# Altium PCB DE-220124.PcbDoc
Units mil, origin at the board's own origin, x right, y up, seen from the top; angles counter-clockwise.
Board outline 4095 x 2385 mil, 2 copper layers (Top Layer, Bottom Layer), stack 12.8 mil thick; 195 components, 109 nets, 551 pads, 65 vias.
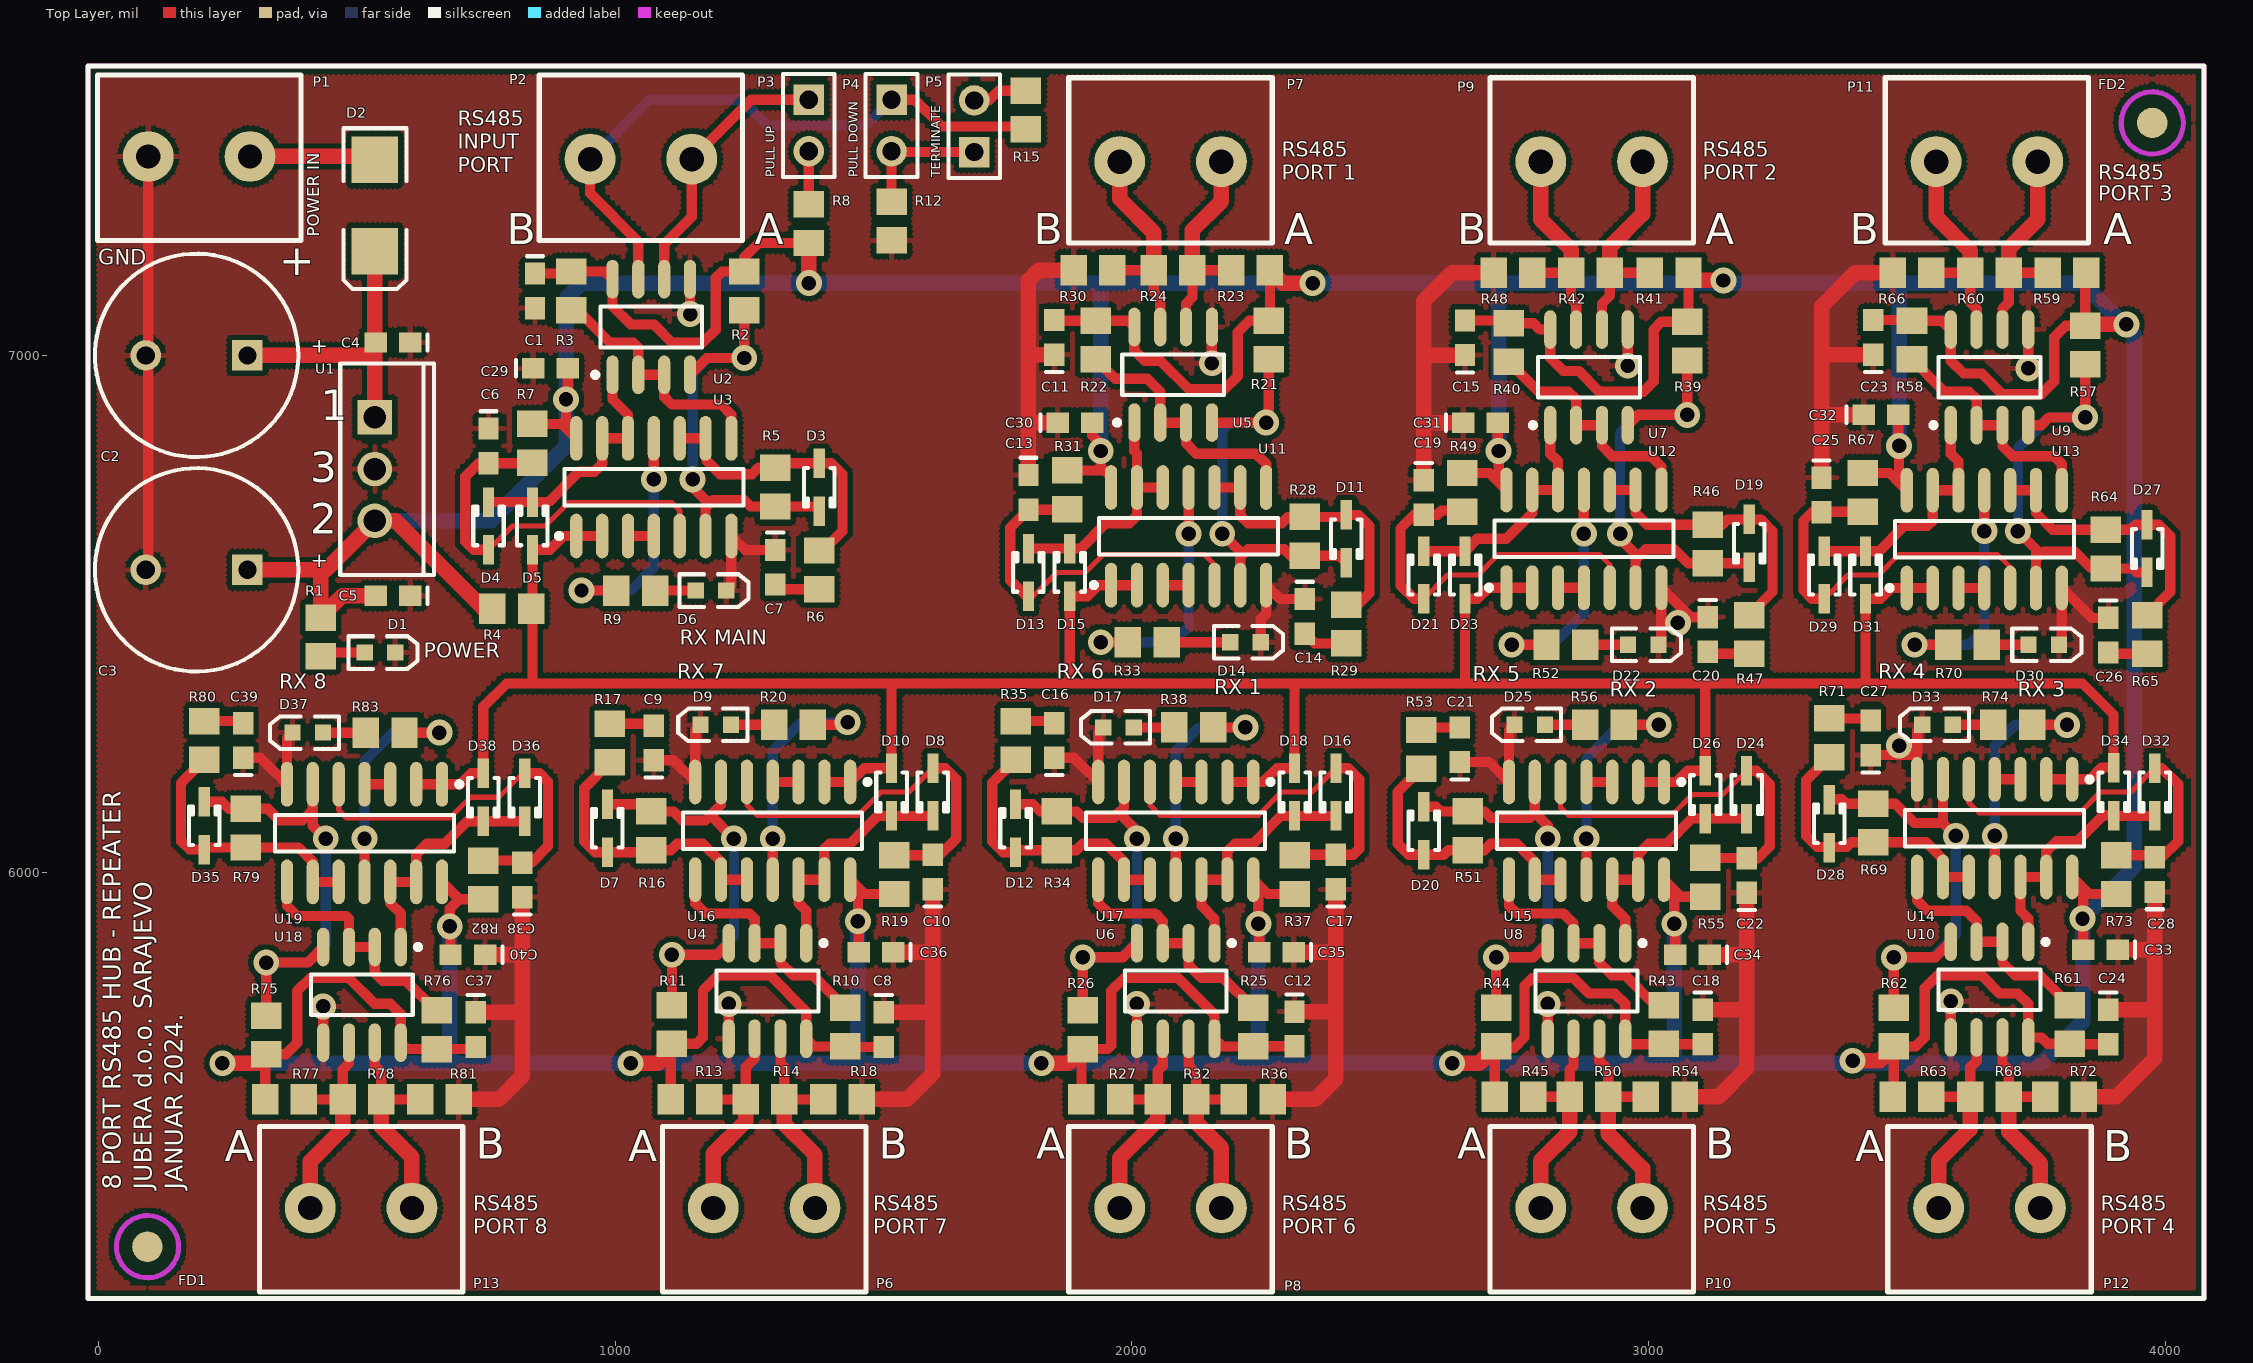
[diagram p0: Top Layer view]
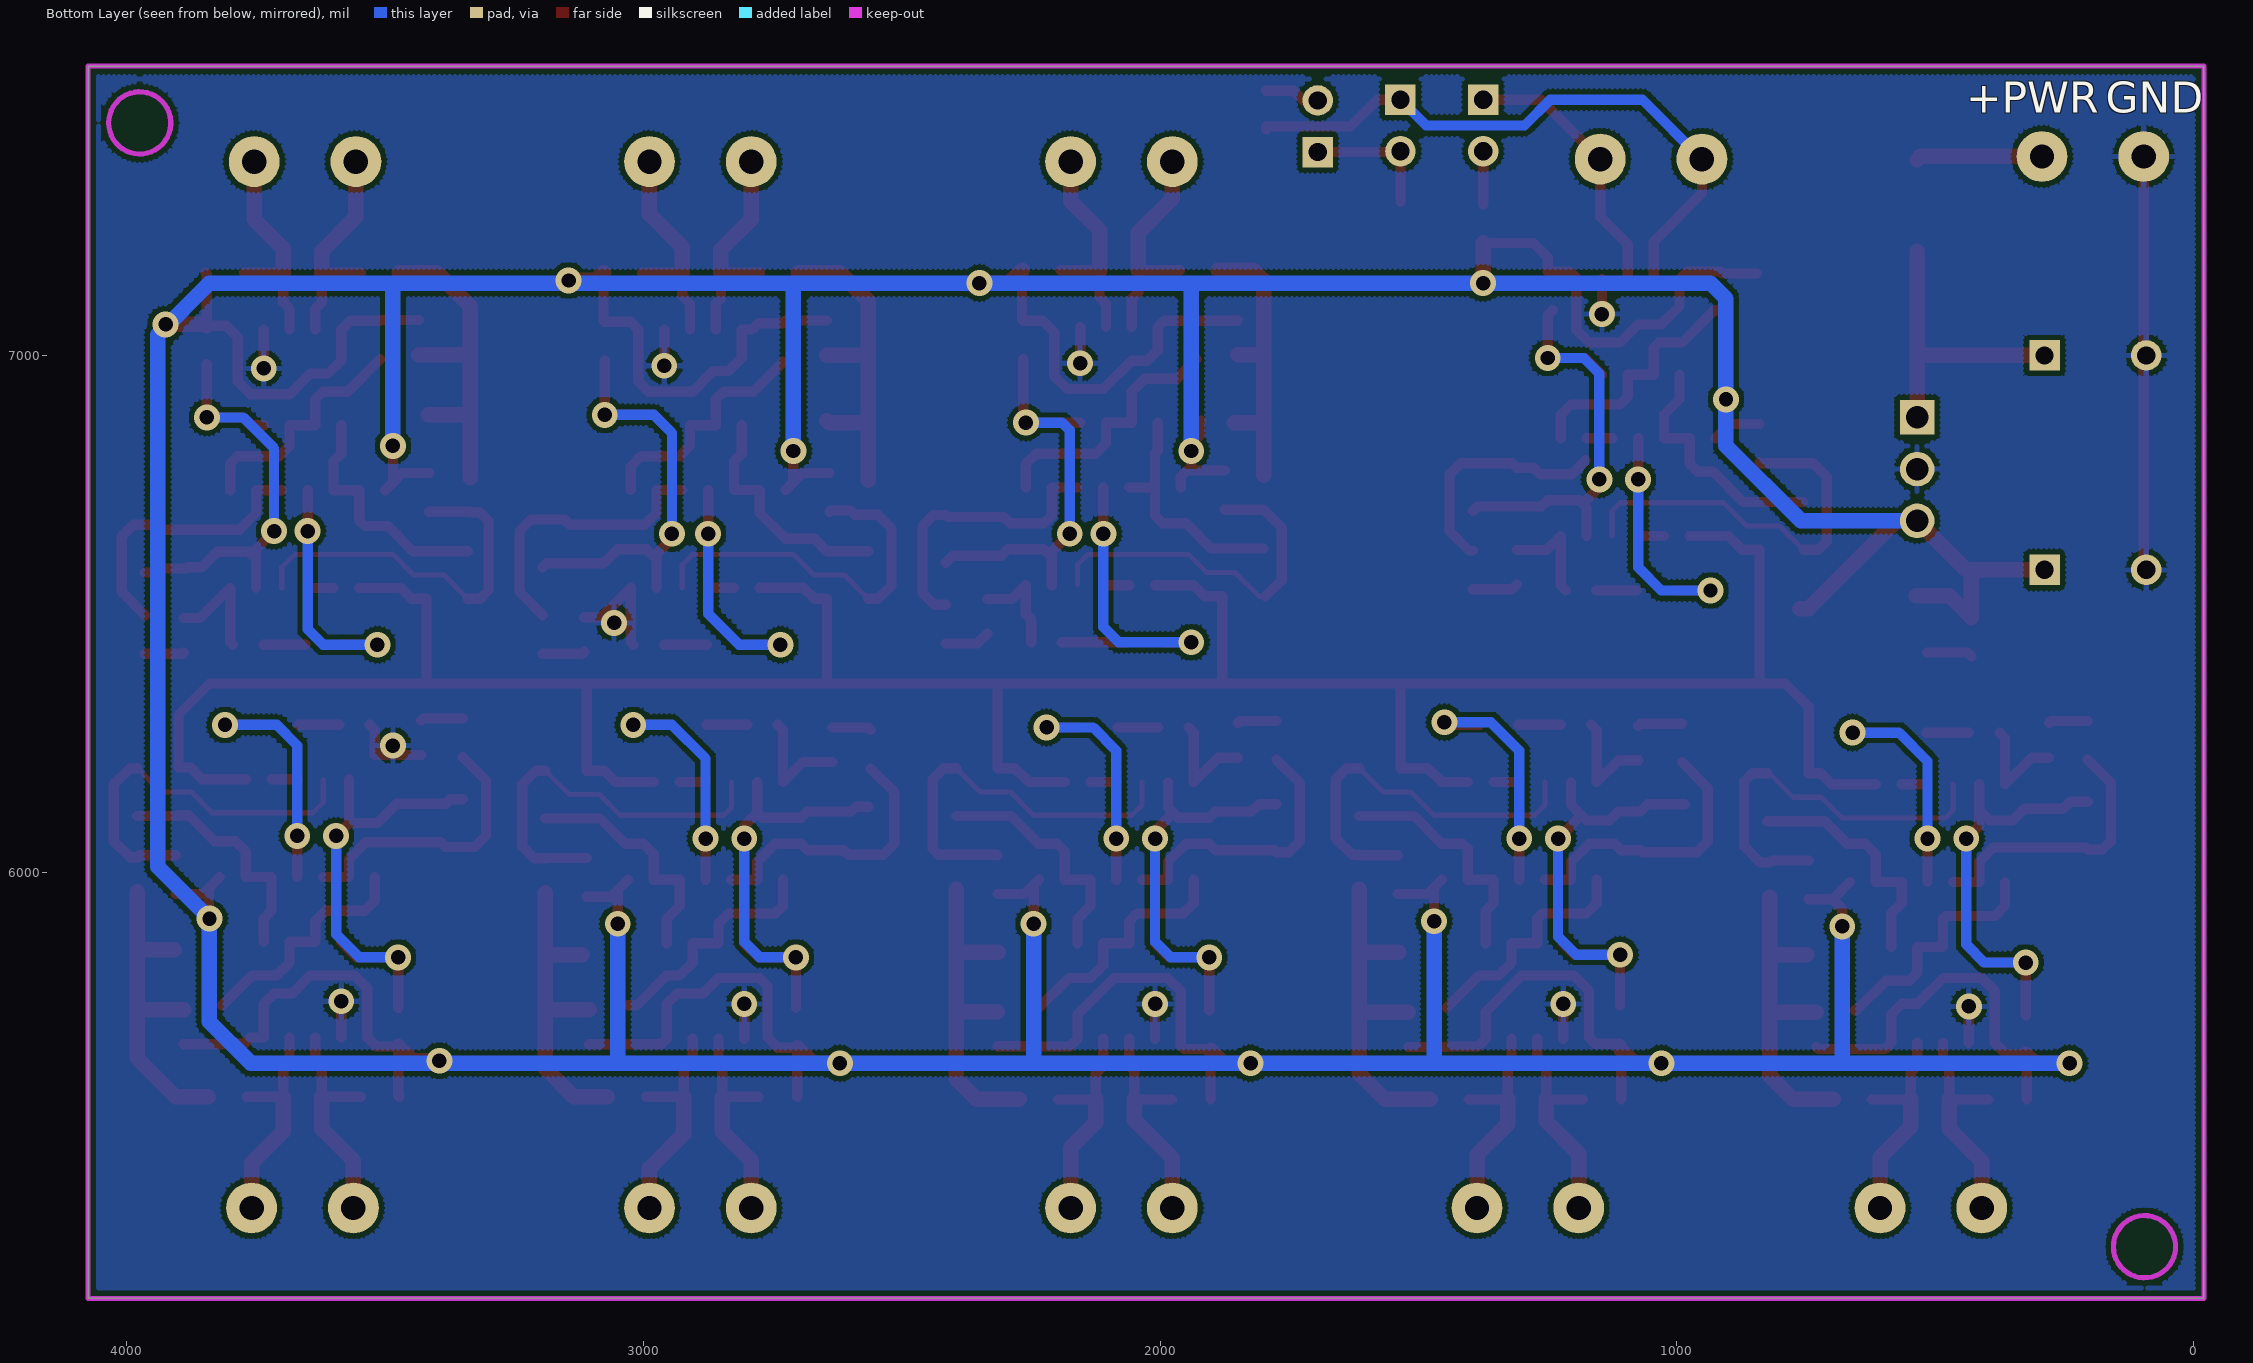
[diagram p1: Bottom Layer view, seen from below]

## Layer stack, top to bottom
Top Solder: solder mask 0.4, Solder Resist, Dk 3.5
Top Layer: signal copper 1.4
Dielectric 1: core 10, FR-4, Dk 4.2
Bottom Layer: signal copper 1.4
Bottom Solder: solder mask 0.4, Solder Resist, Dk 3.5

## Board outline
-20,5175 -20,7560 4075,7560 4075,5175

## Design rules (kind name [scope] priority, off if disabled: settings)
Clearance Clearance_1 [All] p1: gap=10 ignorepadtopadclearanceinfootprint=FALSE except(0: Arc-Hole Track-Hole SMDPad-Hole THPad-Hole Via-Hole Fill-Hole Poly-Hole Region-Hole Text-Hole)
Clearance [All] p2: gap=10 ignorepadtopadclearanceinfootprint=FALSE
MinimumSolderMaskSliver [All] p1 off: minsoldermaskwidth=10
PolygonConnect [All] p1: connectstyle=Relief reliefconductorwidth=10 reliefentries=4 polygonreliefangle="90 Angle" airgapwidth=10
RoutingVias [All] p1: holewidth=28 width=50 viastyle="Through Hole" minholewidth=28 minwidth=50 maxholewidth=28 maxwidth=50
SilkToSilkClearance [All] p1 off: silktosilkclearance=10
SilkToSolderMaskClearance [IsPad] p1 off: minsilkscreentomaskgap=10 clearancetoexposedcopper=TRUE
SolderMaskExpansion [All] p1: expansion=4
Width [All] p1: maxlimit=200 minlimit=10 preferedwidth=30
27 further rules are at their usual default settings.

## Classes and differential pairs
component class DE-220124_02: C37 C38 C39 C40 D35 D36 D37 D38 P13 R75 R76 R77 R78 R79 R80 R81 R82 R83 U18 U19
component class DE-220124: C1 C2 C3 C4 C5 C6 C7 C8 C9 C10 C11 C12 C13 C14 C15 C16 C17 C18 C19 C20 C21 C22 C23 C24 C25 C26 C27 C28 C29 C30 C31 C32 C33 C34 C35 C36 D1 D2 D3 D4 D5 D6 D7 D8 D9 D10 D11 D12 D13 D14 D15 D16 D17 D18 D19 D20 D21 D22 D23 D24 D25 D26 D27 D28 D29 D30 D31 D32 D33 D34 FD1 FD2 P1 P2 P3 P4 P5 P6 P7 P8 P9 P10 P11 P12 R1 R2 R3 R4 R5 R6 R7 R8 R9 R10 R11 R12 R13 R14 R15 R16 R17 R18 R19 R20 R21 R22 R23 R24 R25 R26 R27 R28 R29 R30 R31 R32 R33 R34 R35 R36 R37 R38 R39 R40 R41 R42 R43 R44 R45 R46 R47 R48 R49 R50 R51 R52 R53 R54 R55 R56 R57 R58 R59 R60 R61 R62 R63 R64 R65 R66 R67 R68 R69 R70 R71 R72 R73 R74 U1 U2 U3 U4 U5 U6 U7 U8 U9 U10 U11 U12 U13 U14 U15 U16 U17

## Components (designator, comment, footprint, x,y, rotation, side; value= is the part's Value field where it differs from the comment)
C1 "100nF" 0603 845,7125 r270 top
C2 "470uF" CAPPR5-10X12.5 190,7000 r180 top
C3 "470uF" CAPPR5-10X12.5 190,6585 r180 top
C4 "100nF" 0603 570,7025 r180 top
C5 "100nF" 0603 570,6535 r180 top
C6 "68pF" 0603 755,6825 r270 top
C7 "1nF" 0603 1310,6590 r270 top
C8 "100nF" 0603 1520,5695 r270 top
C9 "1nF" 0603 1075,6250 r90 top
C10 "68pF" 0603 1615,6000 r90 top
C11 "100nF" 0603 1850,7035 r90 top
C12 "100nF" 0603 2315,5696.54 r270 top
C13 "68pF" 0603 1800,6735 r270 top
C14 "1nF" 0603 2335,6495 r270 top
C15 "100nF" 0603 2645,7034.23 r90 top
C16 "1nF" 0603 1850,6255 r90 top
C17 "68pF" 0603 2395,6000 r90 top
C18 "100nF" 0603 3105,5700 r270 top
C19 "68pF" 0603 2565,6725 r270 top
C20 "1nF" 0603 3115,6460 r270 top
C21 "1nF" 0603 2635,6246.54 r90 top
C22 "68pF" 0603 3190,5993.46 r90 top
C23 "100nF" 0603 3435,7035 r90 top
C24 "100nF" 0603 3890,5700 r270 top
C25 "68pF" 0603 3335,6730 r270 top
C26 "1nF" 0603 3890,6458.46 r270 top
C27 "1nF" 0603 3430,6260 r90 top
C28 "68pF" 0603 3980,5995 r90 top
C29 "100nF" 0603 875,6975 r0 top
C30 "100nF" 0603 1890,6870 r0 top
C31 "100nF" 0603 2675,6870 r0 top
C32 "100nF" 0603 3450,6885 r0 top
C33 "100nF" 0603 3875,5850 r180 top
C34 "100nF" 0603 3085,5840 r180 top
C35 "100nF" 0603 2280,5845 r180 top
C36 "100nF" 0603 1505,5845 r180 top
C37 "100nF" 0603 730,5695 r270 top
C38 "1nF" 0603 820,5985 r90 top
C39 "1nF" 0603 280,6255 r90 top
C40 "100nF" 0603 715,5840 r180 top
D1 "HSMZ-C190" 1.6X0.8X0.8 545,6425 r0 top
D2 "D Schottky" SMB 535,7290 r270 top
D3 "1N4148" SOD323 1395,6745 r270 top
D4 "1N4148" SOD323 755,6670 r90 top
D5 "1N5819" SOD323 840,6670 r90 top
D6 "HSMZ-C190" 1.6X0.8X0.8 1185.47,6545 r0 top
D7 "1N4148" SOD323 985,6085 r90 top
D8 "1N4148" SOD323 1615,6155 r270 top
D9 "HSMZ-C190" 1.6X0.8X0.8 1195,6285 r180 top
D10 "1N5819" SOD323 1535,6155 r270 top
D11 "1N4148" SOD323 2415,6645 r270 top
D12 "1N4148" SOD323 1775,6085 r90 top
D13 "1N4148" SOD323 1800,6580 r90 top
D14 "HSMZ-C190" 1.6X0.8X0.8 2220,6445 r0 top
D15 "1N5819" SOD323 1880,6580 r90 top
D16 "1N4148" SOD323 2395,6155 r270 top
D17 "HSMZ-C190" 1.6X0.8X0.8 1974.53,6280 r180 top
D18 "1N5819" SOD323 2315,6155 r270 top
D19 "1N4148" SOD323 3195,6636.26 r270 top
D20 "1N4148" SOD323 2565,6080 r90 top
D21 "1N4148" SOD323 2565,6575 r90 top
D22 "HSMZ-C190" 1.6X0.8X0.8 2990,6440 r0 top
D23 "1N5819" SOD323 2645,6575 r90 top
D24 "1N4148" SOD323 3190,6150 r270 top
D25 "HSMZ-C190" 1.6X0.8X0.8 2770,6285 r180 top
D26 "1N5819" SOD323 3110,6150 r270 top
D27 "1N4148" SOD323 3965,6626.26 r270 top
D28 "1N4148" SOD323 3350,6093.74 r90 top
D29 "1N4148" SOD323 3340,6575 r90 top
D30 "HSMZ-C190" 1.6X0.8X0.8 3765,6440 r0 top
D31 "1N5819" SOD323 3420,6575 r90 top
D32 "1N4148" SOD323 3980,6155 r270 top
D33 "HSMZ-C190" 1.6X0.8X0.8 3559.53,6285 r180 top
D34 "1N5819" SOD323 3900.63,6155.63 r270 top
D35 "1N4148" SOD323 205,6090 r90 top
D36 "1N4148" SOD323 825,6145 r270 top
D37 "HSMZ-C190" 1.6X0.8X0.8 405,6270 r180 top
D38 "1N5819" SOD323 745,6145 r270 top
FD1 "Fiducial" Fiducial 95,5275 r0 top
FD2 "Fiducial" Fiducial 3975,7450 r0 top
P1 "TERMINAL BLOK 2" "TERMINAL BLOK 2" 195,7385 r270 top
P2 "TERMINAL BLOK 2" "TERMINAL BLOK 2" 1050,7380 r90 top
P3 "PULL UP" HDR1X2 1375,7495 r270 top
P4 "PULL DOWN" HDR1X2 1535,7495 r270 top
P5 "TERMINATE" HDR1X2 1695,7393.54 r90 top
P6 "TERMINAL BLOK 2" "TERMINAL BLOK 2" 1288.43,5350 r270 top
P7 "TERMINAL BLOK 2" "TERMINAL BLOK 2" 2075,7375 r90 top
P8 "TERMINAL BLOK 2" "TERMINAL BLOK 2" 2075,5350 r270 top
P9 "TERMINAL BLOK 2" "TERMINAL BLOK 2" 2890,7375 r90 top
P10 "TERMINAL BLOK 2" "TERMINAL BLOK 2" 2890,5350 r270 top
P11 "TERMINAL BLOK 2" "TERMINAL BLOK 2" 3655,7375 r90 top
P12 "TERMINAL BLOK 2" "TERMINAL BLOK 2" 3660,5350 r270 top
P13 "RS485" "TERMINAL BLOK 2" 508.43,5350 r270 top
R1 "1K" ERA-0805 430,6455 r90 top
R2 "1K" ERA-0805 1250,7125 r90 top
R3 "4K7" ERA-0805 915,7125 r90 top
R4 "3K9" ERA-0805 800,6510 r180 top
R5 "27K" ERA-0805 1310,6745 r270 top
R6 "120R" ERA-0805 1395,6585 r90 top
R7 "10K" ERA-0805 840,6830 r270 top
R8 "680R" ERA-0805 1375,7255 r270 top
R9 "1K" ERA-0805 1040,6545 r0 top
R10 "4K7" ERA-0805 1445,5700 r270 top
R11 "1K" ERA-0805 1110,5705 r270 top
R12 "680R" ERA-0805 1535,7260 r270 top
R13 "680R" ERA-0805 1145,5560 r0 top
R14 "120R" ERA-0805 1290,5560 r0 top
R15 "120R" ERA-0805 1795,7475 r270 top
R16 "27K" ERA-0805 1070,6080 r90 top
R17 "120R" ERA-0805 990,6250 r270 top
R18 "680R" ERA-0805 1440,5560 r0 top
R19 "10K" ERA-0805 1540,5995 r90 top
R20 "1K" ERA-0805 1345,6285 r0 top
R21 "1K" ERA-0805 2265,7030 r90 top
R22 "4K7" ERA-0805 1930,7030 r90 top
R23 "680R" ERA-0805 2230,7165 r180 top
R24 "120R" ERA-0805 2080,7165 r180 top
R25 "4K7" ERA-0805 2235,5700 r270 top
R26 "1K" ERA-0805 1905,5695 r270 top
R27 "680R" ERA-0805 1940,5560 r0 top
R28 "27K" ERA-0805 2335,6650 r270 top
R29 "120R" ERA-0805 2415,6480 r90 top
R30 "680R" ERA-0805 1925,7165 r180 top
R31 "10K" ERA-0805 1875,6740 r270 top
R32 "120R" ERA-0805 2087.6,5560 r0 top
R33 "1K" ERA-0805 2030,6445 r0 top
R34 "27K" ERA-0805 1855,6080 r90 top
R35 "120R" ERA-0805 1775,6255 r270 top
R36 "680R" ERA-0805 2235,5560 r0 top
R37 "10K" ERA-0805 2315,5995 r90 top
R38 "1K" ERA-0805 2120,6280 r0 top
R39 "1K" ERA-0805 3075,7027.6 r90 top
R40 "4K7" ERA-0805 2730,7025 r90 top
R41 "680R" ERA-0805 3040,7160 r180 top
R42 "120R" ERA-0805 2887.6,7160 r180 top
R43 "4K7" ERA-0805 3030,5705 r270 top
R44 "1K" ERA-0805 2705,5700 r270 top
R45 "680R" ERA-0805 2740,5565 r0 top
R46 "27K" ERA-0805 3115,6635 r270 top
R47 "120R" ERA-0805 3195,6460 r90 top
R48 "680R" ERA-0805 2737.6,7160 r180 top
R49 "10K" ERA-0805 2640,6735 r270 top
R50 "120R" ERA-0805 2885,5565 r0 top
R51 "27K" ERA-0805 2650,6080 r90 top
R52 "1K" ERA-0805 2840,6440 r0 top
R53 "120R" ERA-0805 2560,6237.6 r270 top
R54 "680R" ERA-0805 3032.4,5565 r0 top
R55 "10K" ERA-0805 3110,5990 r90 top
R56 "1K" ERA-0805 2915,6285 r0 top
R57 "1K" ERA-0805 3845,7020 r90 top
R58 "4K7" ERA-0805 3510,7030 r90 top
R59 "680R" ERA-0805 3810,7160 r180 top
R60 "120R" ERA-0805 3660,7160 r180 top
R61 "4K7" ERA-0805 3815,5705 r270 top
R62 "1K" ERA-0805 3475,5700 r270 top
R63 "680R" ERA-0805 3510,5565 r0 top
R64 "27K" ERA-0805 3885,6625 r270 top
R65 "120R" ERA-0805 3965,6460 r90 top
R66 "680R" ERA-0805 3510,7160 r180 top
R67 "10K" ERA-0805 3415,6735 r270 top
R68 "120R" ERA-0805 3660,5565 r0 top
R69 "27K" ERA-0805 3435,6095 r90 top
R70 "1K" ERA-0805 3617.4,6440 r0 top
R71 "120R" ERA-0805 3350,6260 r270 top
R72 "680R" ERA-0805 3805,5565 r0 top
R73 "10K" ERA-0805 3905,5995 r90 top
R74 "1K" ERA-0805 3705,6285 r0 top
R75 "1K" ERA-0805 325,5685 r270 top
R76 "4K7" ERA-0805 655,5695 r270 top
R77 "680R" ERA-0805 360,5560 r180 top
R78 "120R" ERA-0805 510,5560 r180 top
R79 "27K" ERA-0805 285,6085 r90 top
R80 "120R" ERA-0805 205,6255 r90 top
R81 "680R" ERA-0805 660,5560 r180 top
R82 "27K" ERA-0805 745,5985 r270 top
R83 "1K" ERA-0805 555,6270 r0 top
U1 "L78M05CV" TO220V 535,6780 r270 top
U2 "MAX485" D008_L 1070,7055 r90 top
U3 "MC74AC00D" 751A-03_N 1075,6745 r90 top
U4 "MAX485" D008_L 1295,5770 r270 top
U5 "MAX485" D008_L 2080,6962.52 r90 top
U6 "MAX485" D008_L 2085,5770 r270 top
U7 "MAX485" D008_L 2885,6957.52 r90 top
U8 "MAX485" D008_L 2880,5770 r270 top
U9 "MAX485" D008_L 3660,6957.52 r90 top
U10 "MAX485" D008_L 3660,5772.48 r270 top
U11 "MC74AC00D" 751A-03_N 2110,6650 r90 top
U12 "MC74AC00D" 751A-03_N 2875,6645 r90 top
U13 "MC74AC00D" 751A-03_N 3650,6644.49 r90 top
U14 "MC74AC00D" 751A-03_N 3670,6085 r270 top
U15 "MC74AC00D" 751A-03_N 2880,6080 r270 top
U16 "MC74AC00D" 751A-03_N 1305,6080 r270 top
U17 "MC74AC00D" 751A-03_N 2085,6080 r270 top
U18 "MAX485" D008_L 510,5762.48 r270 top
U19 "MC74AC00D" 751A-03_N 515,6075.51 r270 top

## Footprints (in the part's own frame and the unit in brackets; to place one, negate y for a bottom-side part, rotate by r counter-clockwise, add the part's x,y. Pads: shape width x height; smd on the part's side, far side on the other; paste and mask are expansions set on the pad)
1.6X0.8X0.8 [mm] "SM LED; 2 Flat Leads"
  rect 0.8x0.8 smd: 1(-0.75,0) 2(0.75,0)
  silkscreen extent -1.55,-0.8 1.85,0.8
0603 [mm] "Chip Capacitor; Body 1.6 x 0.8 mm (LxW typ)"
  rect 1.1x1 smd: 1(-0.85,0) 2(0.85,0)
  silkscreen extent -1.7,-0.4 -1.7,0.4
751A-03_N [mm] "SOIC, 14-Leads, Body 8.7x3.9mm, Pitch 1.27mm, IPC Medium Density"
  oval 2.2x0.6 smd: 1(-2.4,3.81) 2(-2.4,2.54) 3(-2.4,1.27) 4(-2.4,0) 5(-2.4,-1.27) 6(-2.4,-2.54) 7(-2.4,-3.81) 8(2.4,-3.81) 9(2.4,-2.54) 10(2.4,-1.27) 11(2.4,0) 12(2.4,1.27) 13(2.4,2.54) 14(2.4,3.81)
  silkscreen extent -2.52,-4.4 0.9,4.78, body extent -2,-4.38 2,4.38, height 1.75
CAPPR5-10X12.5 [mm] "Capacitor, Electrolytic, Radial; Body 10 x 12.5 mm (Dia.xH typ); Pin Spacing 5 mm (typ)"
  rect 1.5x1.5 hole 0.9: 1(-2.5,0)
  round 1.5 hole 0.9: 2(2.5,0)
  silkscreen extent -5,-5 5,5, body extent -5,-5 5,5, height 12.5
D008_L [mm] "SOIC, 8-Leads, Body 4.9x3.9mm, Pitch 1.27mm, IPC High Density"
  oval 1.9x0.6 smd: 1(-2.35,1.905) 2(-2.35,0.635) 3(-2.35,-0.635) 4(-2.35,-1.905) 5(2.35,-1.905) 6(2.35,-0.635) 7(2.35,0.635) 8(2.35,1.905)
  silkscreen extent -2.47,-2.5 1,2.88, body extent -2,-2.5 2,2.5, height 1.75
ERA-0805 [mm] "Chip Resistor; Body 2 x 1.3 mm (LxW typ)"
  rect 1.3x1.5 smd: 1(-0.95,0) 2(0.95,0)
Fiducial [mm] "Pick and place machine mark"
  round 1.5 smd paste+0 mask+0.8: 3(0,0)
  Keep-Out Layer circle w0.254: c0,0 r1.529
HDR1X2 [mm] "Connector; Header; 2 Position"
  rect 1.5x1.5 hole 0.9: 1(0,0)
  round 1.5 hole 0.9: 2(2.54,0)
  silkscreen extent -1.27,-1.27 3.81,1.27
SMB [mm] "DO-214-AA/SMB; 2 C-Bend Leads; Body 5.3 x 3.6 mm, inc. leads (LxW)"
  rect 2.3x2.3 smd: 1(-2.25,0) 2(2.25,0)
  silkscreen extent -3.8,-1.55 4.1,1.55
SOD323 [mm] "SOD-323/SC-76; 2 Leads; Body 1.7 x 1.3 mm, (LxW)"
  rect 1.45x0.55 smd: 1(1.175,0) 2(-1.175,0)
  silkscreen extent -0.95,-0.75 0.95,0.75
"TERMINAL BLOK 2" [mm] "2 pinski terminal blok konektor"
  round 2.5 hole 1.2: 1(0,-2.5) 2(0,2.5)
  silkscreen extent -4,-5 4.13,5
TO220V [mm] "TO, Thru-Hole, Vertical, Heatsink Mounted; 3 In-Line Leads; Pitch 2.54 mm; Pin sequence 1, 3, 2"
  rect 1.7x1.7 hole 1.1: 1(-2.54,0)
  round 1.7 hole 1.1: 2(2.54,0) 3(0,0)
  silkscreen extent -5.2,-1.7 5.2,2.9

## Part data
C1 C4 C5 C6 C7 C8 C9 C10 C11 C12 C13 C14 C15 C16 C17 C18 C19 C20 C21 C22 C23 C24 C25 C26 C27 C28 C29 C30 C31 C32 C33 C34 C35 C36 C37 C38 C39 C40: library part C0603, "Ceramic Chip Capacitor - Standard", PackageDocument=Mar-2001, Code_IPC="1608 [0603]", Code_JEITA=0603, ComponentLink1Description="Manufacturer Link", ComponentLink1URL=http://www.kemet.com/, ComponentLink2Description=Datasheet, ComponentLink2URL=http://www.kemet.com/kemet/web/homepage/kechome.nsf/vapubfilesname/F3102TA.pdf/$file/F3102TA.pdf, DatasheetDocument=Mar-2001, LatestRevisionDate=19-Mar-2004, LatestRevisionNote="Silkscreen size reduced.", Note="Footprint corresponds to dimensions for bulk cassette packaging. This case size has tightened tolerances.", PackageReference=0603, Published=17-Jul-2002, Publisher="Altium Limited"
C2 C3: library part EKA00DC347E00, "Aluminum Electrolytic Capacitor, Radial Style with Long Leads: 470uF, 25V", ComponentLink1Description="Manufacturer Link", ComponentLink1URL=http://www.vishay.com/, ComponentLink2Description=Datasheet, ComponentLink2URL=http://www.vishay.com/docs/25014/eka.pdf, DatasheetDocument=20-Feb-2001, DrillSize="Nominal, Rounded To The Nearest 0.1mm", Note="Refer to Manufacturer's Data Sheets for other lead formations", PackageReference=CAPPR5-10X12.5, Published=19-Mar-2004, Publisher="Altium Limited"
D1 D6 D9 D14 D17 D22 D25 D30 D33 D37: "High Performance Chip LED, Red", LED_Colour=Red, ComponentLink1Description="Manufacturer Link", ComponentLink1URL=http://www.avagotech.com/, ComponentLink2Description=Datasheet, ComponentLink2URL=http://cp.literature.agilent.com/litweb/pdf/5988-5891EN.pdf, DatasheetVersion=11-Mar-2002, LuminousIntensity="40mcd (Minimum).", PackageDescription="SM LED; 2 Flat Leads", PackageReference=1.6X0.8X0.8, PackageVersion=Mar-2002, PCB_Layout="Complies with manufacturer's recommendation.", Published=11-Dec-2002, Publisher="Altium Limited"
D2: "Schottky Diode", Code_JEDEC=DO-214-AA, LatestRevisionDate=17-Jul-2002, LatestRevisionNote="Re-released for DXP Platform.", PackageDescription="DO-214-AA/SMB; 2 C-Bend Leads; Body 5.3 x 3.6 mm, inc. leads (LxW)", PackageReference=SMB, Published=8-Jun-2000, Publisher="Altium Limited"
D3 D4 D5 D7 D8 D10 D11 D12 D13 D15 D16 D18 D19 D20 D21 D23 D24 D26 D27 D28 D29 D31 D32 D34 D35 D36 D38: library part BAS321, "General-purpose Diode", ComponentLink1Description="Manufacturer Link", ComponentLink1URL=http://www.semiconductors.philips.com/, ComponentLink2Description=Datasheet, ComponentLink2URL=http://www.semiconductors.philips.com/acrobat/datasheets/BAS321_2.pdf, DatasheetVersion=9-Feb-1999, LatestRevisionDate=19-Mar-2004, LatestRevisionNote="Silkscreen size reduced.", PackageDescription="SOD-323/SC-76; 2 Leads; Body 1.7 x 1.3 mm, (LxW)", PackageReference=SOD323, PackageVersion=May-1999, Published=17-Sep-2003, Publisher="Altium Limited"
FD1 FD2: library part Fiduchial, "Fiduchial mark"
P1 P2 P6 P7 P8 P9 P10 P11 P12: "2 pinski terminal blok"
P3 P4 P5: library part "Header 2", "Header, 2-Pin", LatestRevisionDate=17-Jul-2002, LatestRevisionNote="Re-released for DXP Platform.", Publisher="Altium Limited"
P13: library part "TERMINAL BLOK 2", "2 pinski terminal blok"
R1 R2 R3 R4 R5 R6 R7 R8 R9 R10 R11 R12 R13 R14 R15 R16 R17 R18 R19 R20 R21 R22 R23 R24 R25 R26 R27 R28 R29 R30 R31 R32 R33 R34 R35 R36 R37 R38 R39 R40 R41 R42 R43 R44 R45 R46 R47 R48 R49 R50 R51 R52 R53 R54 R55 R56 R57 R58 R59 R60 R61 R62 R63 R64 R65 R66 R67 R68 R69 R70 R71 R72 R73 R74 R75 R76 R77 R78 R79 R80 R81 R82 R83: library part ERA6Y, "Rectangular Thick Film Chip Resistor, 10 Ohm to 1M Ohm Range, 0.1% and 0.5% Tolerance, 0805 Size, 0.1 W", PackageDocument=Mar-2003, Code_IPC="2012 [0805]", ComponentLink1Description="Manufacturer Link", ComponentLink1URL=http://www.panasonic.com/industrial/components/resistive_products.htm, ComponentLink2Description=Datasheet, ComponentLink2URL=http://www.panasonic.com/industrial/components/pdf/AOA0000CE8.pdf, LatestRevisionDate=19-Mar-2004, LatestRevisionNote="Silkscreen size reduced.", Note="If flow soldering, adjust pad width of PCB Footprint to 0.7 - 0.8 times the width of the resistor.", PackageReference=ERA-0805, Published=17-Dec-2003, Publisher="Altium Limited"
U1: "Positive Voltage Regulator", ComponentLink1Description="Manufacturer Link", ComponentLink1URL=http://www.st.com/, ComponentLink2Description=Datasheet, ComponentLink2URL=http://www.st.com/stonline/products/literature/ds/2146/l78m05c.pdf, DatasheetVersion=Apr-1994, LatestRevisionDate=17-Jul-2002, LatestRevisionNote="Re-released for DXP Platform.", Note="Tab is connected to pin 3 (GND).", PackageDescription="TO, Thru-Hole, Vertical, Heatsink Mounted; 3 In-Line Leads; Pitch 2.54 mm; Pin sequence 1, 3, 2", PackageReference=TO220V, Published=24-Aug-2001, Publisher="Altium Limited"
U2 U4 U5 U6 U7 U8 U9 U10 U18: library part SN75176BD, "Differential Bus Transceiver", Code_IPC=SOIC127P600-8, ComponentLink1Description="Manufacturer Link", ComponentLink1URL=http://www.ti.com/, ComponentLink2Description=Datasheet, ComponentLink2URL=http://www-s.ti.com/sc/ds/sn75176b.pdf, DatasheetVersion=Sep-1989, LatestRevisionDate=13-Apr-2006, LatestRevisionNote="IPC-7351 Footprint Added.", Note="Receiver Hysteresis of 50mV Typical", PackageDescription="8-Pin Small Outline Integrated Circuit 1.27 mm Pitch", PackageReference=D008, PackageVersion=Jan-1998, Published=15-May-2002, Publisher="Altium Limited"
U3 U11 U12 U13 U14 U15 U16 U17 U19: "Quad 2-Input NAND Gate", Code_IPC=SOIC127P600-14, Code_JEDEC=MS-012-AB, ComponentLink1Description="Manufacturer Link", ComponentLink1URL=http://www.onsemi.com/, ComponentLink2Description=Datasheet, ComponentLink2URL=http://www.onsemi.com/pub/Collateral/MC74AC00-D.PDF, DatasheetVersion=9-Apr-1996, LatestRevisionDate=13-Apr-2006, LatestRevisionNote="IPC-7351 Footprint Added.", PackageDescription="14-Pin Small Outline Integrated Circuit 1.27 mm Pitch", PackageReference=751A-03, Published=15-Apr-2002, Publisher="Altium Limited"

## Via types
v1: diameter 50, hole 28, Top Layer to Bottom Layer, 65 vias

## Nets (pads, with @x,y where several pads share a name; then routed paths per layer and width w, separated by ;. In a path a pad name is that pad's centre, name@x,y a point inside that pad or via, vN(x,y) a via of type N, cw(c..) or ccw(c..) an arc to the next point about the centre after c; other vN are vias at no path point)
+5V: C1.1 C3.1 C5.2 C8.2 C11.2 C12.2 C15.2 C18.2 C23.2 C24.2 C29.2 C30.2 C31.2 C32.2 C33.2 C34.2 C35.2 C36.2 C37.2 C40.2 R1.2 R2.2 R3.2 R4.2 R7.1 R8.2 R10.2 R11.2 R13.1 R19.1 R21.2 R22.2 R23.1 R25.2 R26.2 R27.1 R31.1 R37.1 R39.2 R40.2 R41.1 R43.2 R44.2 R45.1 R49.1 R55.1 R57.2 R58.2 R59.1 R61.2 R62.2 R63.1 R67.1 R73.1 R75.2 R76.2 R77.2 R82.2 U1.2 U2.8 U3.14 U4.8 U5.8 U6.8 U7.8 U8.8 U9.8 U10.8 U11.14 U12.14 U13.14 U14.14 U15.14 U16.14 U17.14 U18.8 U19.14 | length 20846.9
  Top Layer w20: R77.2 R75.2@322.6,5645.2 ; R75.2 362.6,5647.6 385,5670 385,5770 410,5795 485,5795 535,5745 565,5745 585,5725 U18.8 597.36,5657.6 R76.2 726.06,5657.6 C37.2 ; U19.14 698.43,5947.6 ; C40.2 681.54,5893.46 v1(680,5895) 680,5929.17 698.43,5947.6 ; R82.2 698.43,5947.6 ; R7.1 897.09,6867.4 ; C1.1 911.06,7158.46 R3.2 980.12,7162.4 U2.8 995,7095 1030,7060 1075,7060 1110,7025 1170,7025 1195,7050 1195,7150 1207.4,7162.4 R2.2@1240,7162.4 ; C29.2 908.46,6918.46 v1(905,6915) 905,6875.31 897.09,6867.4 ; U3.14 897.09,6867.4 ; R13.1 1107.6,5655 1107.6,5665.2 R11.2 1157.6,5667.6 1170,5680 1170,5770 1200,5800 1300,5800 1370,5730 U4.8 1384.88,5662.6 R10.2 1446.06,5661.54 C8.2 ; R2.2 1250,7190 1277.6,7217.6 R8.2 ; U16.14 1472.76,5967.76 ; C36.2 1471.54,5903.46 v1(1470,5905) 1470,5965 1472.76,5967.76 ; R19.1 1482.91,5957.6 1472.76,5967.76 ; C11.2 1851.06,7067.4 R22.2 1992.64,7067.4 U5.8 2005,7010 2025,6990 2055,6990 2110,6935 2180,6935 2205,6960 2205,7045 2227.4,7067.4 R21.2 2267.4,7069.8 R23.1 ; R31.1 1940,6777.4 ; R27.1 1902.6,5655.2 R26.2 1952.6,5657.6 1960,5665 1960,5770 1985,5795 2090,5795 2160,5725 U6.8 2174.88,5662.6 R25.2 2235.47,5663.07 C12.2 ; C30.2@1920,6873.46 C30.2 1923.46,6845 1940,6828.46 v1(1940,6815) 1940,6777.4 ; U11.14 1960,6765 1947.6,6777.4 1940,6777.4 ; U17.14 U17.14@2245,5975.51 ; C35.2 2246.54,5898.46 v1(2245,5900) U17.14@2245,5975.51 ; R37.1 2262.91,5957.6 U17.14@2245,5975.51 ; R49.1 2692.09,6772.4 2710,6754.49 ; C15.2 2724.71,7067.69 R40.2 2777.6,7062.4 2789.96,7050.04 U7.8 2810,6995 2835,6970 2865,6970 2905,6930 2990,6930 3010,6950 3010,7050 3025,7065 R39.2 3077.4,7067.4 R41.1 ; R45.1 2702.6,5660.2 2740.2,5660.2 2760,5680 2760,5780 2775,5795 2855,5795 2885,5765 2935,5765 2955,5745 U8.8 2965.94,5666.54 C18.2 ; C31.2 2708.46,6816.54 v1(2710,6815) 2710,6754.49 ; U12.14 2710,6754.49 ; U15.14 3055,5960.51 ; C34.2 3051.54,5898.46 v1(3050,5900) 3050,5955.51 3055,5960.51 ; R55.1 3062.91,5952.6 3055,5960.51 ; R67.1 3466.57,6772.4 3485,6753.98 ; C23.2 3508.94,7068.46 R58.2 3567.64,7067.4 U9.8 3585,6990 3610,6965 3645,6965 3685,6925 3760,6925 3785,6950 3785,7035 3807.4,7057.4 R57.2 3845,7157.6 R59.1 ; R63.1 3475,5567.4 R62.2 3517.6,5662.6 3535,5680 3535,5775 3560,5800 3645,5800 3680,5765 3715,5765 3735,5745 U10.8 3760.04,5679.96 3772.4,5667.6 R61.2 3816.06,5666.54 C24.2 ; C32.2 3483.46,6826.54 v1(3485,6825) 3485,6753.98 ; U13.14 3485,6753.98 ; U14.14 3845.26,5965.26 ; C33.2 3841.54,5961.54 3845.26,5965.26 ; R73.1 3852.91,5957.6 3845.26,5965.26
  Top Layer w30: v1(240,5630) 307.4,5630 322.6,5645.2 R75.2 ; C3.1 430,6585 ; C5.2 472.6,6535 R1.2 430,6585 ; R4.2 745,6510 575,6680 U1.2 440,6585 430,6585 ; v1(1030,5630) 1082.6,5630 R11.2@1107.6,5655 ; v1(1375,7140) R8.2 ; v1(1825,5630) 1877.4,5630 R26.2@1902.6,5655.2 ; R23.1 2292.4,7140 v1(2350,7140) ; v1(2620,5630) 2672.4,5630 R44.2@2702.6,5660.2 ; R41.1 3092.4,7145 v1(3145,7145) ; v1(3395,5635) 3447.4,5635 R62.2 ; R57.2 3847.6,7060 v1(3925,7060)
  Bottom Layer w30: v1(240,5630) 680,5630 ; U1.2 760,6680 905,6825 v1(905,6915) 905,7110 935,7140 v1(1375,7140) 1940,7140 ; v1(680,5895) 680,5630 ; v1(1470,5905) 1470,5630 ; v1(1940,6815) 1940,7140 ; v1(2245,5900) 2245,5630 ; v1(2710,6815) 2710,7140 ; v1(3050,5900) 3050,5635 3045,5630 ; v1(3485,6825) 3485,7140 ; 680,5630 v1(1030,5630) 1470,5630 ; 1470,5630 v1(1825,5630) 2245,5630 ; 1940,7140 v1(2350,7140) 2710,7140 ; 2245,5630 v1(2620,5630) 3045,5630 ; 2710,7140 3485,7140 ; 3045,5630 3760,5630 3840,5710 v1(3840,5910) 3940,6010 3940,7040 3840,7140 3485,7140
DBUS: D5.2 D10.2 D15.2 D18.2 D23.2 D26.2 D31.2 D34.2 D38.2 R4.1 U3.1 U3.2 U11.1 U11.2 U12.1 U12.2 U13.1 U13.2 U14.1 U14.2 U15.1 U15.2 U16.1 U16.2 U17.1 U17.2 U19.1 U19.2 | length 5943.4
  Top Layer w20: U19.2 U19.1 700,6170 721.26,6191.26 D38.2 745,6320 790,6365 840,6365 ; U3.2 U3.1 900.51,6650.51 873.74,6623.74 D5.2 840,6365 ; U16.2 U16.1 1481.77,6201.26 D10.2 1535,6365 ; U11.2 U11.1 1935.51,6555.51 1913.74,6533.74 D15.2 1880,6365 ; U17.2 U17.1 2254.49,6174.49 2281.26,6201.26 D18.2 2315,6365 ; U12.2 U12.1 2690.51,6550.51 2668.74,6528.74 D23.2 2645,6365 ; U15.2 U15.1 3054.49,6174.49 3076.26,6196.26 D26.2 3110,6365 ; U13.2 U13.1 3470,6550 3448.74,6528.74 D31.2 3420,6365 ; U14.2 U14.1 3854.49,6179.49 3877.52,6202.52 3900,6202.52 3900,6305 3840,6365 3420,6365 ; 840,6365 1535,6365 ; 1535,6365 1880,6365 ; 1880,6365 2315,6365 ; 2315,6365 2645,6365 ; 2645,6365 3110,6365 ; 3110,6365 3420,6365
GND: C1.2 C2.2 C3.2 C4.1 C5.1 C6.1 C7.1 C8.1 C9.1 C10.1 C11.1 C12.1 C13.1 C14.1 C15.1 C16.1 C17.1 C18.1 C19.1 C20.1 C21.1 C22.1 C23.1 C24.1 C25.1 C26.1 C27.1 C28.1 C29.1 C30.1 C31.1 C32.1 C33.1 C34.1 C35.1 C36.1 C37.1 C38.1 C39.1 C40.1 D1.2 D6.2 D9.2 D14.2 D17.2 D22.2 D25.2 D30.2 D33.2 D37.2 P1.1 R12.2 R18.2 R30.2 R36.2 R48.2 R54.2 R66.2 R72.2 R81.1 U1.3 U2.5 U3.7 U4.5 U5.5 U6.5 U7.5 U8.5 U9.5 U10.5 U11.7 U12.7 U13.7 U14.7 U15.7 U16.7 U17.7 U18.5 U19.7 | length 8542.7
  Top Layer w20: C3.2 96.57,6590 P1.1 ; C39.1 313.46,6221.54 U19.7 365,6259.53 D37.2 ; U18.5 v1(435,5740) ; C9.1 1112.95,6216.54 U16.7 1155,6274.53 D9.2 ; v1(1145,7080) U2.5 ; D6.2 1225,6555 U3.7 1252.05,6623.46 C7.1 ; U4.5 v1(1220,5745) ; C16.1 1887.95,6221.54 U17.7 1935,6270 D17.2 ; U6.5 v1(2010,5745) ; v1(2155,6985) U5.5 ; D14.2 2249.53,6489.53 2260,6500 U11.7 2287.05,6528.46 C14.1 ; C21.1 2691.42,6213.07 U15.7 2730,6274.53 D25.2 ; U8.5 v1(2805,5745) ; v1(2960,6980) U7.5 ; D22.2 3025,6445.47 U12.7 3082.05,6493.46 C20.1 ; C27.1 3519.29,6226.54 3520,6227.24 3520,6275 D33.2 ; U10.5 v1(3585,5750) ; v1(3735,6975) U9.5 ; D30.2 3800,6445.47 U13.7 3858.07,6491.93 C26.1
  Top Layer w30: R81.1 775,5560 820,5605 820,5720 ; C37.1 811.54,5728.46 820,5720 ; C40.1 815,5840 820,5835 ; C38.1 820,5835 ; R18.2 1565,5560 1615,5610 1615,5725 ; C8.1 1611.54,5728.46 1615,5725 ; C36.1 1610,5845 1615,5840 ; C10.1 1615,5840 ; C13.1 1800,6875 ; C11.1 1803.46,7001.54 1800,7005 ; C30.1 1805,6870 1800,6875 ; R30.2 1820,7165 1800,7145 1800,7005 ; R36.2 2355,5560 2395,5600 2395,5725 ; C35.1 2395,5845 ; C12.1 2390,5730 2395,5725 ; C17.1 2395,5845 ; C19.1 2565,6870 ; C31.1@2645,6873.46 C31.1 2565,6870 ; C15.1 2565.76,7000.76 2565,7000 ; R48.2 2620,7160 2565,7105 2565,7000 ; R54.2 3135,5565 3190,5620 3190,5730 ; C18.1 3186.54,5733.46 3190,5730 ; C34.1 3185,5840 3190,5835 ; C22.1 3190,5835 ; C25.1 3335,6890 ; C32.1 3340,6885 3335,6890 ; C23.1 3341.54,7001.54 3335,6995 ; R66.2 3400,7160 3335,7095 3335,6995 ; R72.2 3905,5565 3980,5640 3980,5735 ; C24.1 3978.46,5733.46 3980,5735 ; C33.1 3980,5850 ; C28.1 3980,5850 ; 820,5720 820,5835 ; 1615,5725 1615,5840 ; 1800,6875 1800,7005 ; 2395,5725 2395,5845 ; 2565,6870 2565,7000 ; 3190,5730 3190,5835 ; 3335,6890 3335,6995 ; 3980,5735 3980,5850
  other v1: 3485,6245 3057.02,6482.44
NetC2_1: C2.1 C4.2 D2.2 U1.1 | length 570.1
  Top Layer w30: C2.1 530,7000 535,7005 ; U1.1 535,7005 ; D2.2 535,7005
NetC6_2: C6.2 D4.2 R7.2 U3.5 | length 781.7
  Top Layer w10: D4.2 801.26,6670 865,6670 910,6715 1110,6715 1125,6700 U3.5
  Top Layer w20: D4.2 726.26,6623.74 710,6640 710,6765 736.54,6791.54 C6.2 838.94,6791.54 R7.2
NetC7_2: C7.2 R6.1 | length 88.7
  Top Layer w20: C7.2 1318.94,6547.6 R6.1
NetC9_2: C9.2 R17.1 | length 86.6
  Top Layer w20: R17.1 1071.06,6287.4 C9.2
NetC10_2: C10.2 D8.2 R19.2 U16.5 | length 752.9
  Top Layer w10: U16.5 1255,6130 1275,6110 1470,6110 1515,6155 1568.74,6155 D8.2
  Top Layer w20: R19.2 1613.94,6032.4 C10.2 1628.46,6033.46 1660,6065 1660,6180 1638.74,6201.26 D8.2
NetC13_2: C13.2 D13.2 R31.2 U11.5 | length 715.9
  Top Layer w10: D13.2@1796.26,6533.74 D13.2 1808.74,6533.74 1855,6580 1910,6580 1945,6615 2140,6615 2160,6595 U11.5
  Top Layer w20: D13.2@1796.26,6533.74 1765,6565 1765,6666.54 C13.2 1873.94,6701.54 R31.2
NetC14_2: C14.2 R29.1 | length 87.8
  Top Layer w20: C14.2 2353.94,6442.6 R29.1
NetC16_2: C16.2 R35.1 | length 76.6
  Top Layer w20: R35.1 1846.06,6292.4 C16.2
NetC17_2: C17.2 D16.2 R37.2 U17.5 | length 769.6
  Top Layer w10: U17.5 2035,6130 2055,6110 2245,6110 2290,6155 2348.74,6155 D16.2
  Top Layer w20: R37.2 2316.06,6033.46 C17.2 2428.46,6033.46 2440,6045 2440,6180 2418.74,6201.26 D16.2
NetC19_2: C19.2 D21.2 R49.2 U12.5 | length 749.9
  Top Layer w10: D21.2 2611.26,6575 2670,6575 2710,6615 2905,6615 2925,6595 U12.5
  Top Layer w20: D21.2 2546.26,6528.74 2520,6555 2520,6665 2546.54,6691.54 C19.2 2591.54,6691.54 2600,6700 2637.6,6700 R49.2
NetC20_2: C20.2 R47.1 | length 81.6
  Top Layer w20: C20.2 3118.94,6422.6 R47.1
NetC21_2: C21.2 R53.1 | length 77.1
  Top Layer w20: R53.1 2565,6280 C21.2
NetC22_2: C22.2 D24.2 R55.2 U15.5 | length 762.1
  Top Layer w10: U15.5 2830,6125 2845,6110 3045,6110 3085,6150 3143.74,6150 D24.2
  Top Layer w20: R55.2 3189.53,6027.4 C22.2 3211.93,6026.93 3235,6050 3235,6170 3208.74,6196.26 D24.2
NetC25_2: C25.2 D29.2 R67.2 U13.5 | length 750.1
  Top Layer w10: D29.2 3386.26,6575 3445,6575 3485,6615 3675,6615 3700,6590 U13.5
  Top Layer w20: D29.2 3316.26,6528.74 3300,6545 3300,6680 3316.54,6696.54 C25.2 3336.06,6697.6 R67.2
NetC26_2: C26.2 R65.1 | length 76
  Top Layer w20: C26.2 3892.4,6422.6 R65.1
NetC27_2: C27.2 R71.1 | length 81.6
  Top Layer w20: R71.1 3426.06,6297.4 C27.2
NetC28_2: C28.2 D32.2 R73.2 U14.5 | length 751.1
  Top Layer w10: U14.5 3620,6135 3640,6115 3835,6115 3875,6155 3933.74,6155 D32.2
  Top Layer w20: R73.2 3976.06,6032.4 C28.2 3993.46,6028.46 4025,6060 4025,6170 3993.74,6201.26 D32.2
NetC38_2: C38.2 D36.2 R82.1 U19.5 | length 768.4
  Top Layer w10: U19.5 465,6120 480,6105 680,6105 720,6145 775,6145 821.26,6191.26 D36.2
  Top Layer w20: R82.1 816.06,6022.4 C38.2 838.46,6018.46 870,6050 870,6175 853.74,6191.26 D36.2
NetC39_2: C39.2 R80.2 | length 76.6
  Top Layer w20: R80.2 276.06,6292.4 C39.2
NetD1_1: D1.1 R1.1 | length 88.5
  Top Layer w20: R1.1 437.4,6425 D1.1
NetD2_1: D2.1 P1.2 | length 244.2
  Top Layer w30: P1.2 528.58,7385 D2.1
NetD3_1: D3.1 R2.1 R5.2 U2.4 U3.6 | length 883.1
  Top Layer w20: U2.4 1177.52,6995 v1(1250,6995) 1250,7077.6 R2.1@1240,7087.6 ; v1(1150,6760) 1150,6745 1182.5,6712.5 ; U3.6 1175,6705 1182.5,6712.5 ; D3.1 1386.14,6707.6 R5.2 1262.4,6707.6 1250,6720 1190,6720 1182.5,6712.5
  Bottom Layer w20: v1(1150,6760) 1150,6965 1180,6995 v1(1250,6995)
NetD3_2: D3.2 R5.1 R6.2 U3.9 U3.10 | length 512.5
  Top Layer w20: U3.10 U3.9 ; U3.9@1176.82,6796.82 1203.64,6770 1265,6770 1277.4,6782.4 R5.1 1318.86,6791.26 D3.2 1418.74,6791.26 1440,6770 1440,6660 1402.4,6622.4 R6.2
NetD4_1: D4.1 D5.1 U2.1 U3.12 U3.13 | length 485.5
  Top Layer w20: D4.1 D5.1 871.26,6716.26 930,6775 960,6775 975,6790 U3.13 U3.12 1025,6885 995,6915 U2.1
NetD6_1: D6.1 R9.2 | length 78.5
  Top Layer w20: R9.2 D6.1
NetD7_1: D7.1 R11.1 R16.2 U4.4 U16.6 | length 894.9
  Top Layer w20: D7.1 1056.14,6131.26 R16.2 1112.6,6117.4 1130,6100 1175,6100 1185,6110 ; R11.1 v1(1110,5840) 1197.48,5840 U4.4 ; U16.6 1205,6130 1185,6110 ; v1(1230,6065) 1185,6110
  Bottom Layer w20: v1(1110,5840) 1195,5840 1230,5875 v1(1230,6065)
NetD7_2: D7.2 R16.1 R17.2 U16.9 U16.10 | length 552.8
  Top Layer w20: R17.2 940,6162.6 940,6060 961.26,6038.74 D7.2 1066.14,6038.74 R16.1 1107.6,6042.6 1120,6055 1170,6055 1205,6020 U16.9 U16.10
NetD8_1: D8.1 D10.1 U4.1 U16.12 U16.13 | length 475.1
  Top Layer w20: U4.1 1370,5925 1355,5940 U16.12 U16.13 1405,6045 1415,6055 1455,6055 1508.74,6108.74 D10.1 D8.1
NetD9_1: D9.1 R20.1 | length 83.1
  Top Layer w20: D9.1 R20.1
NetD11_1: D11.1 R21.1 R28.2 U5.4 U11.6 | length 859.9
  Top Layer w20: U5.4 v1(2260,6870) 2265,6870 R21.1 ; v1(2175,6655) 2210,6620 2210,6610 ; U11.6 2210,6610 ; D11.1 2401.14,6612.6 R28.2 2307.4,6612.6 2295,6625 2225,6625 2210,6610
  Bottom Layer w20: v1(2175,6655) 2175,6855 2190,6870 v1(2260,6870)
NetD11_2: D11.2 R28.1 R29.2 U11.9 U11.10 | length 560.6
  Top Layer w20: U11.10 U11.9 2210,6690 2225,6675 2290,6675 2302.4,6687.4 R28.1 2411.14,6687.4 D11.2 2438.74,6691.26 2460,6670 2460,6540 2437.4,6517.4 R29.2
NetD12_1: D12.1 R26.1 R34.2 U6.4 U17.6 | length 879.6
  Top Layer w20: D12.1 1808.74,6131.26 1822.6,6117.4 R34.2 1892.6,6117.4 1905,6105 1965,6105 1975,6115 ; R26.1 v1(1905,5835) 1982.48,5835 U6.4 ; U17.6 1985,6125 1975,6115 ; v1(2010,6065) 2010,6080 1975,6115
  Bottom Layer w20: v1(1905,5835) 1980,5835 2010,5865 v1(2010,6065)
NetD12_2: D12.2 R34.1 R35.2 U17.9 U17.10 | length 545.8
  Top Layer w20: R35.2 1730,6172.6 1730,6060 1751.26,6038.74 D12.2 1778.86,6042.6 R34.1 1892.6,6042.6 1905,6055 1950,6055 1985,6020 U17.9 U17.10
NetD13_1: D13.1 D15.1 U5.1 U11.12 U11.13 | length 468.5
  Top Layer w20: D13.1 D15.1 1901.26,6626.26 1950,6675 1995,6675 2010,6690 U11.13 ; U5.1 2005,6815 2010,6810 U11.13 ; U11.12 U11.13
NetD14_1: D14.1 R33.2 | length 123.1
  Top Layer w20: R33.2 D14.1
NetD16_1: D16.1 D18.1 U6.1 U17.12 U17.13 | length 476.3
  Top Layer w20: U6.1 2160,5910 2135,5935 U17.12 U17.13 2185,6040 2200,6055 2235,6055 2288.74,6108.74 D18.1 D16.1
NetD17_1: D17.1 R38.1 | length 78.5
  Top Layer w20: D17.1 R38.1
NetD19_1: D19.1 R39.1 R46.2 U7.4 U12.6 | length 927.7
  Top Layer w20: v1(2945,6655) 2945,6645 2975,6615 2975,6605 ; U7.4 2980,6885 v1(3075,6885) R39.1 ; U12.6 2975,6605 ; D19.1 3187.4,6597.6 R46.2 3077.4,6597.6 3050,6625 2995,6625 2975,6605
  Bottom Layer w20: v1(2945,6655) 2945,6850 2980,6885 v1(3075,6885)
NetD19_2: D19.2 R46.1 R47.2 U12.9 U12.10 | length 563.6
  Top Layer w20: U12.10 U12.9 2975,6695 2997.6,6672.4 R46.1 3142.4,6672.4 3152.52,6682.52 D19.2 3217.48,6682.52 3240,6660 3240,6542.4 R47.2
NetD20_1: D20.1 R44.1 R51.2 U8.4 U15.6 | length 869.2
  Top Layer w20: D20.1 2588.74,6126.26 2597.6,6117.4 R51.2 2682.6,6117.4 2695,6105 2770,6105 2780,6115 ; R44.1 v1(2705,5835) 2777.48,5835 U8.4 ; U15.6 2780,6115 ; v1(2805,6065) 2805,6090 2780,6115
  Bottom Layer w20: v1(2705,5835) 2775,5835 2805,5865 v1(2805,6065)
NetD20_2: D20.2 R51.1 R53.2 U15.9 U15.10 | length 545.4
  Top Layer w20: R53.2 2515,6155.2 2515,6055 2536.26,6033.74 D20.2 2603.74,6033.74 2612.6,6042.6 R51.1 2682.6,6042.6 2695,6055 2745,6055 2780,6020 U15.9 U15.10
NetD21_1: D21.1 D23.1 U7.1 U12.12 U12.13 | length 466.8
  Top Layer w20: D21.1 D23.1 2668.74,6645 2725,6645 2775,6695 U12.13 U12.12 2825,6795 2810,6810 U7.1
NetD22_1: D22.1 R52.2 | length 83.1
  Top Layer w20: R52.2 D22.1
NetD24_1: D24.1 D26.1 U8.1 U15.12 U15.13 | length 471.3
  Top Layer w20: U8.1 2955,5910 2930,5935 U15.12 U15.13 2980,6035 3000,6055 3035,6055 3083.74,6103.74 D26.1 D24.1
NetD25_1: D25.1 R56.1 | length 78.1
  Top Layer w20: D25.1 R56.1
NetD27_1: D27.1 R57.1 R64.2 U9.4 U13.6 | length 895.9
  Top Layer w20: v1(3715,6660) 3750,6625 3750,6605 ; U9.4 3760,6865 3775,6880 v1(3845,6880) R57.1 ; U13.6 3750,6605 ; D27.1 3945,6580 3937.4,6587.6 R64.2 3882.6,6590 3855,6590 3825,6620 3765,6620 3750,6605
  Bottom Layer w20: v1(3715,6660) 3715,6820 3775,6880 v1(3845,6880)
NetD27_2: D27.2 R64.1 R65.2 U13.9 U13.10 | length 552.2
  Top Layer w20: U13.10 U13.9 3750,6695 3782.6,6662.4 R64.1 3932.4,6662.4 3942.52,6672.52 D27.2 3987.48,6672.52 4010,6650 4010,6542.4 R65.2
NetD28_1: D28.1 R62.1 R69.2 U10.4 U14.6 | length 907.7
  Top Layer w20: D28.1@3350,6141.26 3373.74,6141.26 3382.6,6132.4 R69.2 3477.6,6132.4 3515,6095 3570,6095 ; R62.1 v1(3475,5835) 3555,5835 U10.4 ; U14.6 3570,6095 ; v1(3595,6070) 3570,6095
  Bottom Layer w20: v1(3475,5835) 3550,5835 3595,5880 v1(3595,6070)
NetD28_2: D28.2 R69.1 R71.2 U14.9 U14.10 | length 546.7
  Top Layer w20: R71.2 3305,6177.6 3305,6070 3326.26,6048.74 3383.74,6048.74 3392.6,6057.6 R69.1 3537.4,6057.6 3570,6025 U14.9 U14.10
NetD29_1: D29.1 D31.1 U9.1 U13.12 U13.13 | length 475.5
  Top Layer w20: D29.1 D31.1 3446.26,6621.26 3495,6670 3540,6670 3550,6680 U13.13 U13.12 3600,6795 3585,6810 U9.1
NetD30_1: D30.1 R70.2 | length 80.7
  Top Layer w20: R70.2 D30.1
NetD32_1: D32.1 D34.1 U10.1 U14.12 U14.13 | length 470.7
  Top Layer w20: U10.1 3735,5910 3720,5925 U14.12 U14.13 3770,6040 3790,6060 3830,6060 3880,6110 3900,6110 D34.1 3901.26,6108.74 D32.1
NetD33_1: D33.1 R74.1 | length 78.5
  Top Layer w20: D33.1 R74.1
NetD35_1: D35.1 R75.1 R79.2 U18.4 U19.6 | length 908.2
  Top Layer w20: D35.1 238.74,6136.26 252.6,6122.4 R79.2 327.6,6122.4 350,6100 395,6100 415,6120 ; R75.1 v1(325,5825) 405,5825 U18.4 ; U19.6 415,6120 ; v1(440,6065) 415,6090 415,6120
  Bottom Layer w20: v1(325,5825) 405,5825 440,5860 v1(440,6065)
NetD35_2: D35.2 R79.1 R80.1 U19.9 U19.10 | length 540
  Top Layer w20: R80.1 160,6172.6 160,6060 176.26,6043.74 D35.2 208.86,6047.6 R79.1 387.4,6047.6 415,6020 U19.9 U19.10
NetD36_1: D36.1 D38.1 U18.1 U19.12 U19.13 | length 474.7
  Top Layer w20: U18.1 585,5920 565,5940 U19.12 U19.13 615,6035 635,6055 670,6055 713.74,6098.74 D38.1 D36.1
NetD37_1: D37.1 R83.1 | length 83.1
  Top Layer w20: D37.1 R83.1
NetP2_1: P2.1 P3.1 U2.6 | length 528.8
  Top Layer w20: U2.6 1095,7215 1148.43,7268.43 P2.1 1263.43,7495 P3.1
NetP2_2: P2.2 P4.1 R15.2 U2.7 | length 1230.6
  Top Layer w20: P2.2 951.57,7313.43 1045,7220 U2.7 ; P4.1 1580,7495 1631.93,7443.07 1795,7443.07 R15.2
  Bottom Layer w20: P2.2 1066.57,7495 1245,7495 1295,7445 1485,7445 P4.1
NetP3_2: P3.2 R8.1 | length 102.6
  Top Layer w20: R8.1 P3.2
NetP4_2: P4.2 P5.1 R12.1 | length 258.2
  Top Layer w20: R12.1 P4.2 1536.46,7393.54 P5.1
NetP5_2: P5.2 R15.1 | length 107.8
  Top Layer w20: P5.2 1723.54,7493.54 1742.4,7512.4 R15.1
NetP6_1: P6.1 R13.2 R14.1 U4.6 | length 430.8
  Top Layer w20: R13.2 R14.1 1252.6,5622.6 1270,5640 U4.6
  Top Layer w30: P6.1 1190,5455 1252.6,5517.6 R14.1
NetP6_2: P6.2 R14.2 R18.1 U4.7 | length 430.4
  Top Layer w20: U4.7 1320,5630 1327.4,5622.6 R14.2 R18.1
  Top Layer w30: R14.2 1327.4,5512.6 1386.85,5453.15 P6.2
NetP7_1: P7.1 R23.2 R24.1 U5.6 | length 423.5
  Top Layer w20: U5.6 2105,7100 2117.4,7112.4 R24.1 R23.2
  Top Layer w30: R24.1 2117.4,7242.4 2173.43,7298.43 P7.1
NetP7_2: P7.2 R24.2 R30.1 U5.7 | length 432.6
  Top Layer w20: R30.1 R24.2 2042.6,7122.4 2055,7110 U5.7
  Top Layer w30: P7.2 1976.57,7303.43 2042.6,7237.4 R24.2
NetP8_1: P8.1 R27.2 R32.1 U6.6 | length 434.8
  Top Layer w20: R27.2 R32.1 2050.2,5615.2 2060,5625 U6.6
  Top Layer w30: P8.1 1976.57,5446.57 2050.2,5520.2 R32.1
NetP8_2: P8.2 R32.2 R36.1 U6.7 | length 426.4
  Top Layer w20: U6.7 2110,5625 2125,5610 R32.2 R36.1
  Top Layer w30: R32.2 2125,5515 2173.43,5466.57 P8.2
NetP9_1: P9.1 R41.2 R42.1 U7.6 | length 435
  Top Layer w20: U7.6 2910,7100 2925,7115 R42.1 R41.2
  Top Layer w30: R42.1 2925,7210 2988.43,7273.43 P9.1
NetP9_2: P9.2 R42.2 R48.1 U7.7 | length 428.5
  Top Layer w20: R48.1 R42.2 2850.2,7109.8 2860,7100 U7.7
  Top Layer w30: P9.2 2791.57,7263.43 2850.2,7204.8 R42.2
NetP10_1: P10.1 R45.2 R50.1 U8.6 | length 423.9
  Top Layer w20: R45.2 R50.1 2847.6,5617.6 2855,5625 U8.6
  Top Layer w30: P10.1 2791.57,5441.57 2847.6,5497.6 R50.1
NetP10_2: P10.2 R50.2 R54.1 U8.7 | length 434.6
  Top Layer w20: U8.7 2905,5635 2922.4,5617.6 R50.2 R54.1
  Top Layer w30: R50.2 2922.4,5492.6 2988.43,5426.57 P10.2
NetP11_1: P11.1 R59.2 R60.1 U9.6 | length 428.5
  Top Layer w20: U9.6 3685,7090 3697.4,7102.4 R60.1 R59.2
  Top Layer w30: R60.1 3697.4,7207.4 3753.43,7263.43 P11.1
NetP11_2: P11.2 R60.2 R66.1 U9.7 | length 432.6
  Top Layer w20: R66.1 R60.2 3622.6,7102.4 3635,7090 U9.7
  Top Layer w30: P11.2 3556.57,7268.43 3622.6,7202.4 R60.2
NetP12_1: P12.1 R63.2 R68.1 U10.6 | length 430.6
  Top Layer w20: R63.2 R68.1 3622.6,5622.6 3635,5635 U10.6
  Top Layer w30: P12.1@3561.57,5355 3561.57,5441.57 3622.6,5502.6 R68.1
NetP12_2: P12.2 R68.2 R72.1 U10.7 | length 425.6
  Top Layer w20: U10.7 3685,5630 3697.4,5617.6 R68.2 R72.1
  Top Layer w30: R68.2 3697.4,5497.6 3758.43,5436.57 P12.2@3758.43,5355
NetP13_1: P13.1 R77.1 R78.2 U18.6 | length 426.2
  Top Layer w20: R77.1 R78.2 472.6,5617.6 485,5630 U18.6
  Top Layer w30: P13.1 410,5440 472.6,5502.6 R78.2
NetP13_2: P13.2 R78.1 R81.2 U18.7 | length 424.9
  Top Layer w20: U18.7 535,5625 547.4,5612.6 R78.1 R81.2
  Top Layer w30: R78.1 547.4,5507.6 606.85,5448.15 P13.2
NetR3_1: R3.1 U2.2 U2.3 U3.8 | length 495.1
  Top Layer w20: R3.1 927.4,7087.6 990,7025 1035,7025 1045,7015 U2.2 U2.3 1095,6920 1110,6905 1205,6905 1225,6885 U3.8
NetR9_1: R9.1 U3.11 | length 475.7
  Top Layer w20: v1(935,6545) R9.1 ; v1(1075,6760) U3.11
  Bottom Layer w20: v1(935,6545) 1030,6545 1075,6590 v1(1075,6760)
NetR10_1: R10.1 U4.2 U4.3 U16.8 | length 469.2
  Top Layer w20: U16.8 1155,5940 1175,5920 1260,5920 1270,5910 U4.3 U4.2 1320,5825 1345,5800 1382.4,5800 R10.1
NetR20_2: R20.2 U16.11 | length 486.9
  Top Layer w20: U16.11 v1(1305,6065) ; R20.2 1445,6285 v1(1450,6290)
  Bottom Layer w20: v1(1305,6065) 1305,6235 1360,6290 v1(1450,6290)
NetR22_1: R22.1 U5.2 U5.3 U11.8 | length 518
  Top Layer w20: R22.1 1967.6,6955 2030,6955 2055,6930 U5.2 U5.3 2105,6830 2125,6810 2240,6810 2260,6790 U11.8
NetR25_1: R25.1 U6.2 U6.3 U17.8 | length 479.2
  Top Layer w20: U17.8 1935,5940 1955,5920 2045,5920 2060,5905 U6.3 U6.2 2110,5820 2135,5795 2177.4,5795 R25.1
NetR33_1: R33.1 U11.11 | length 514.5
  Top Layer w20: v1(1940,6445) R33.1 ; v1(2110,6655) U11.11
  Bottom Layer w20: v1@1930,6445 v1(1940,6445) 2080,6445 2110,6475 v1(2110,6655)
NetR38_2: R38.2 U17.11 | length 465.7
  Top Layer w20: U17.11 v1(2085,6065) ; R38.2 v1(2220,6280)
  Bottom Layer w20: v1(2085,6065) 2085,6235 2130,6280 v1(2220,6280)
NetR40_1: R40.1 U7.2 U7.3 U12.8 | length 477.2
  Top Layer w20: R40.1 2787.6,6930 2845,6930 2860,6915 U7.2 U7.3 2910,6825 2930,6805 3005,6805 3025,6785 U12.8
NetR43_1: R43.1 U8.2 U8.3 U15.8 | length 474.2
  Top Layer w20: U15.8 2730,5935 2745,5920 2835,5920 2855,5900 U8.3 U8.2 2905,5825 2930,5800 2955,5800 3012.6,5742.4 R43.1
NetR52_1: R52.1 U12.11 | length 471.9
  Top Layer w20: v1(2735,6440) R52.1 ; v1(2875,6655) U12.11
  Bottom Layer w20: v1(2735,6440) 2815,6440 2875,6500 v1(2875,6655)
NetR56_2: R56.2 U15.11 | length 469
  Top Layer w20: U15.11 v1(2880,6065) ; R56.2 v1(3020,6285)
  Bottom Layer w20: v1(2880,6065) 2880,6220 2945,6285 v1(3020,6285)
NetR58_1: R58.1 U9.2 U9.3 U13.8 | length 477.7
  Top Layer w20: R58.1 3572.6,6930 3620,6930 3635,6915 U9.2 U9.3 3685,6825 3705,6805 3785,6805 3800,6790 U13.8
NetR61_1: R61.1 U10.2 U10.3 U14.8 | length 471.3
  Top Layer w20: U14.8 3520,5945 3540,5925 3615,5925 3635,5905 U10.3 U10.2 3685,5825 3710,5800 3757.4,5800 R61.1
NetR70_1: R70.1 U13.11 | length 481.4
  Top Layer w20: v1(3515,6440) R70.1 ; v1(3650,6660) U13.11
  Bottom Layer w20: v1(3515,6440) 3620,6440 3650,6470 v1(3650,6660)
NetR74_2: R74.2 U14.11 | length 478.7
  Top Layer w20: U14.11 v1(3670,6070) ; R74.2 v1(3810,6285)
  Bottom Layer w20: v1(3670,6070) 3670,6245 3710,6285 v1(3810,6285)
NetR76_1: R76.1 U18.2 U18.3 U19.8 | length 481.5
  Top Layer w20: U19.8 365,5935 385,5915 480,5915 485,5910 U18.3 U18.2 535,5805 550,5790 595,5790 652.6,5732.4 R76.1
NetR83_2: R83.2 U19.11 | length 469.4
  Top Layer w20: U19.11 v1(515,6065) ; R83.2 v1(660,6270)
  Bottom Layer w20: v1(515,6065) 515,6215 570,6270 v1(660,6270)
NetU3_3: U3.3 U3.4 | length 50
  Top Layer w20: U3.3 U3.4
NetU11_3: U11.3 U11.4 | length 50
  Top Layer w20: U11.3 U11.4
NetU12_3: U12.3 U12.4 | length 50
  Top Layer w20: U12.3 U12.4
NetU13_3: U13.3 U13.4 | length 50
  Top Layer w20: U13.3 U13.4
NetU14_3: U14.3 U14.4 | length 50
  Top Layer w20: U14.4 U14.3
NetU15_3: U15.3 U15.4 | length 50
  Top Layer w20: U15.4 U15.3
NetU16_3: U16.3 U16.4 | length 50
  Top Layer w20: U16.4 U16.3
NetU17_3: U17.3 U17.4 | length 50
  Top Layer w20: U17.4 U17.3
NetU19_3: U19.3 U19.4 | length 50
  Top Layer w20: U19.4 U19.3
VCC: 
pads on no net: FD1.3 FD2.3

## Polygon pours and split planes (outlines as drawn)
GND on Top Layer "Bottom Layer-No Net" (hatched 90Degree grid 10 track 10, remove dead copper, pour order 12): -20,7560 -20,5175 4075,5175 4075,7560
GND on Bottom Layer "Bottom Layer-No Net" (hatched 90Degree grid 10 track 10, remove dead copper, pour order 10): -20,7560 4075,7560 4075,5175 -20,5175

## Keep-outs
Keep-Out Layer:
  the board outline again, w10

## Silkscreen, mask and mechanical layers (free items; w line width, h text height)
Top Overlay:
  the board outline again, w10
  text "RS485" at 695,7435 h50
  text "INPUT" at 695,7390 h50
  text "RS485" at 2290,7375 h50
  text "RS485" at 3105,7375 h50
  text "PORT" at 695,7345 h50
  text "PULL UP" at 1315,7345 h30 r90
  text "PULL DOWN" at 1475,7345 h30 r90
  text "TERMINATE" at 1635,7345 h30 r90
  text "PORT 1" at 2290,7330 h50
  text "PORT 2" at 3105,7330 h50
  text "RS485" at 3870,7330 h50
  text "PORT 3" at 3870,7290 h50
  text "POWER IN" at 435,7230 h40 r90
  text "B" at 790,7215 h60
  text "A" at 1270,7215 h60
  text "B" at 1810,7215 h60
  text "A" at 2295,7215 h60
  text "B" at 2630,7215 h60
  text "A" at 3110,7215 h60
  text "B" at 3390,7215 h60
  text "A" at 3880,7215 h60
  text "GND" at 0,7175 h30
  text "+" at 350,7155 h60
  text "RX MAIN" at 1125,6430 h50
  text "POWER" at 630,6405 h50
  text "RX 7" at 1120,6365 h50
  text "RX 6" at 1855,6365 h50
  text "RX 4" at 3445,6365 h50
  text "RX 5" at 2660,6360 h50
  text "RX 8" at 350,6345 h50
  text "RX 1" at 2160,6335 h50
  text "RX 2" at 2925,6330 h50
  text "RX 3" at 3715,6330 h50
  text "B" at 730,5445 h60
  text "B" at 1510,5445 h60
  text "A" at 1815,5445 h60
  text "B" at 2295,5445 h60
  text "A" at 2630,5445 h60
  text "B" at 3110,5445 h60
  text "A" at 245,5440 h60
  text "A" at 1025,5440 h60
  text "A" at 3400,5440 h60
  text "B" at 3880,5440 h60
  text "8 PORT RS485 HUB - REPEATER" at 55,5385 h60 r90
  text "JUBERA d.o.o. SARAJEVO" at 115.23,5384.88 h60 r90
  text "JANUAR 2024." at 175,5384.88 h60 r90
  text "RS485" at 725,5335 h50
  text "RS485" at 1500,5335 h50
  text "RS485" at 2290,5335 h50
  text "RS485" at 3105,5335 h50
  text "RS485" at 3875,5335 h50
  text "PORT 8" at 725,5290 h50
  text "PORT 7" at 1500,5290 h50
  text "PORT 6" at 2290,5290 h50
  text "PORT 5" at 3105,5290 h50
  text "PORT 4" at 3875,5290 h50
Bottom Overlay:
  text "GND" at 170,7470 h60
  text "+PWR" at 440,7470 h60
Mechanical 13:
  the board outline again, w10

## Dimensions
4075,7560 to 4075,5175 on Mechanical 1
-20,7560 to 4075,7560 on Mechanical 1

## Text inside footprints (layer, text, board x,y; h text height)
C2: Top Overlay "+" at 444.53,7029.53 h30 r180
C3: Top Overlay "+" at 444.53,6614.53 h30 r180
U1: Top Overlay "1" at 430,6875 h59.06; Top Overlay "2" at 410,6655 h59.06; Top Overlay "3" at 410,6755 h59.06